# Allegro board pc043a_single_maroc_05.brd
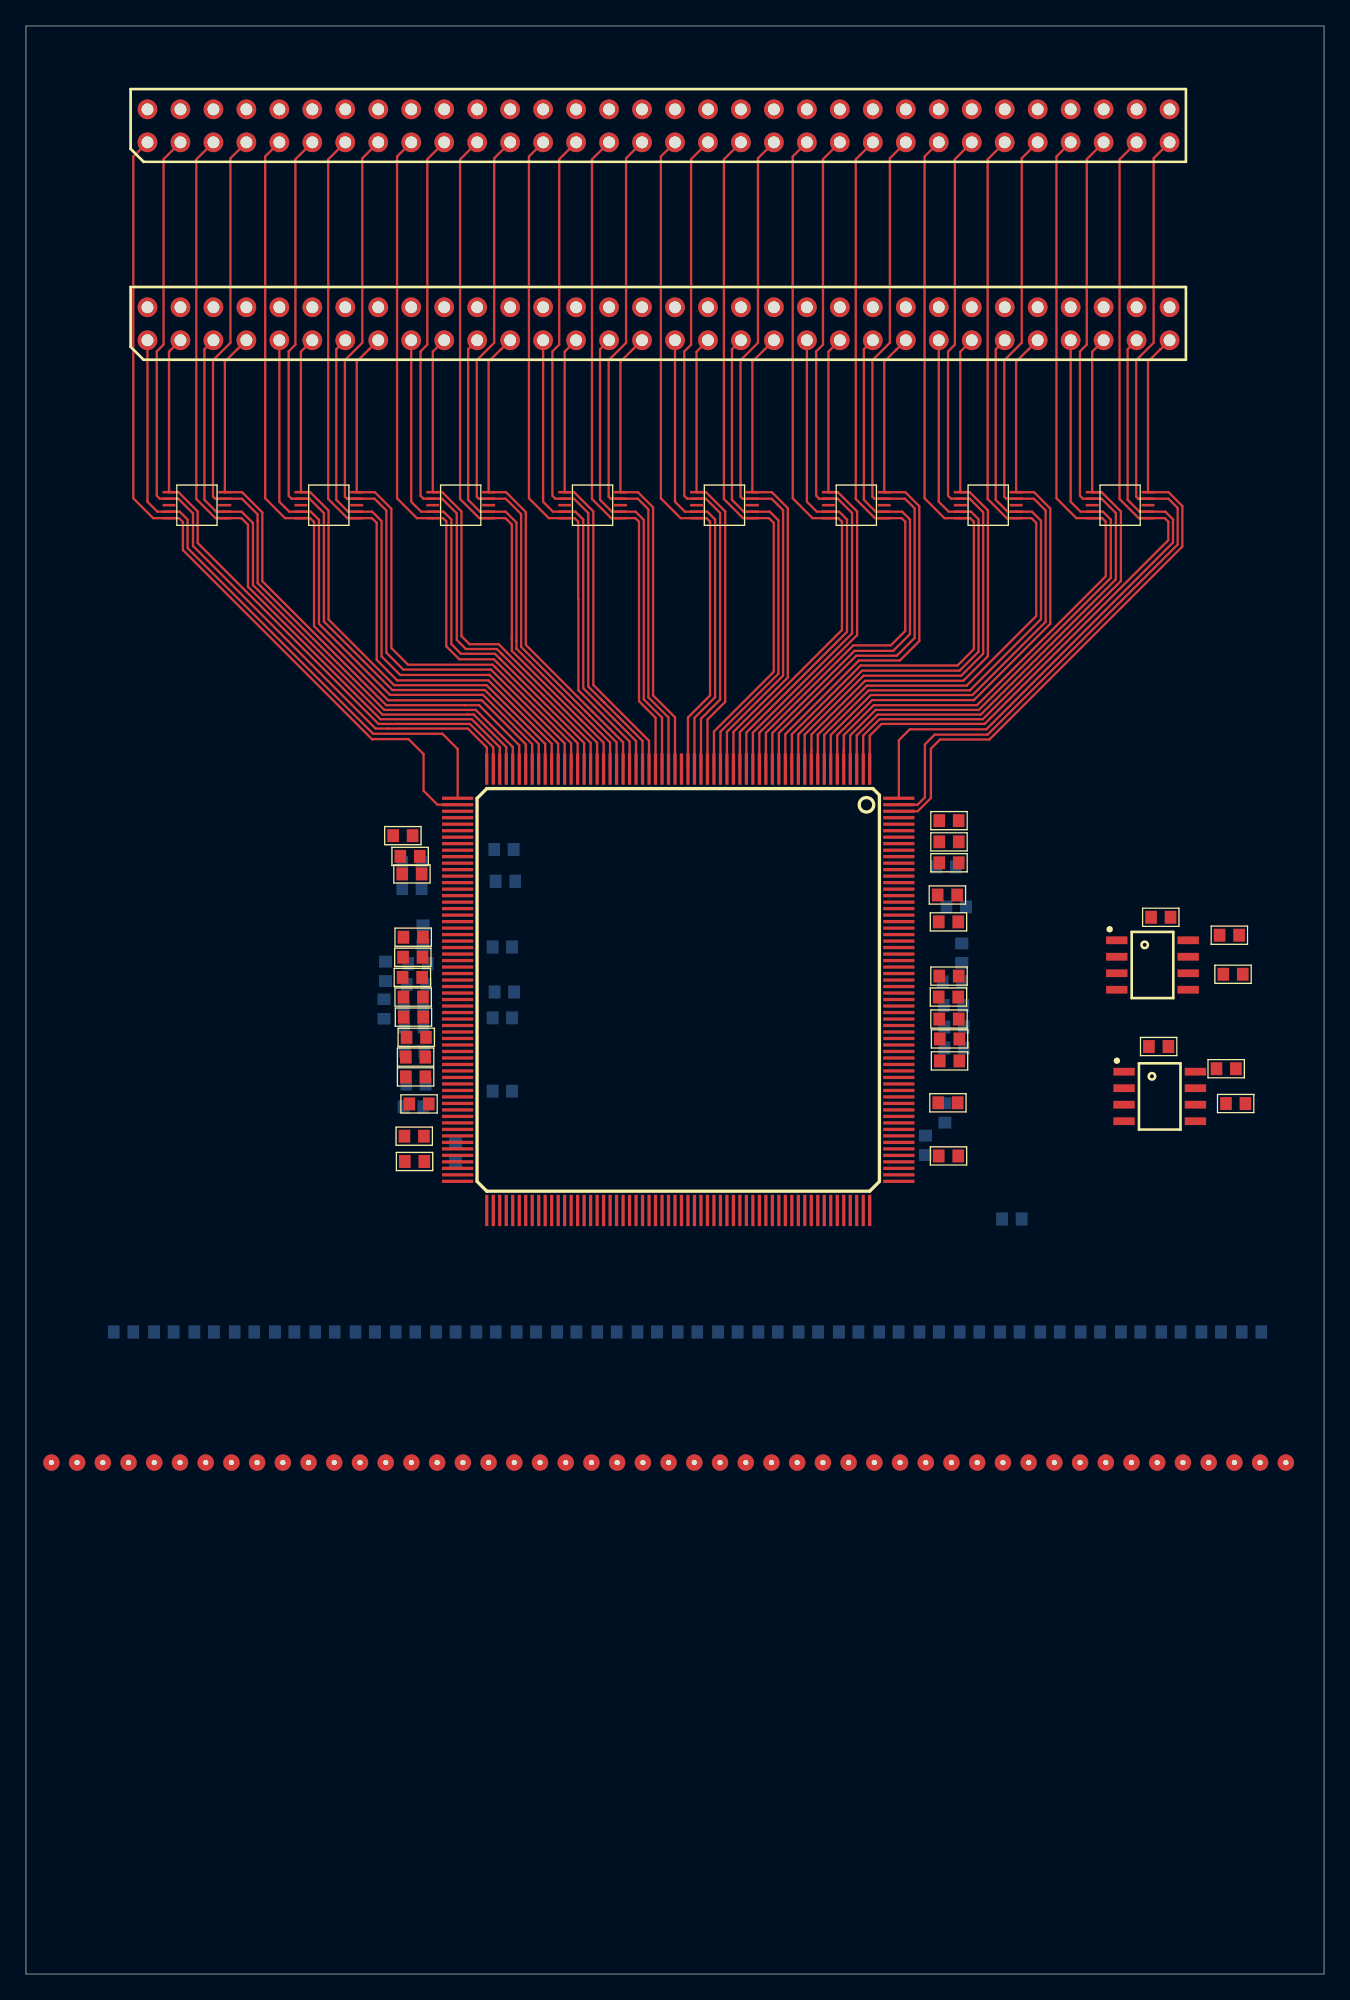
[diagram p0: board, top side]
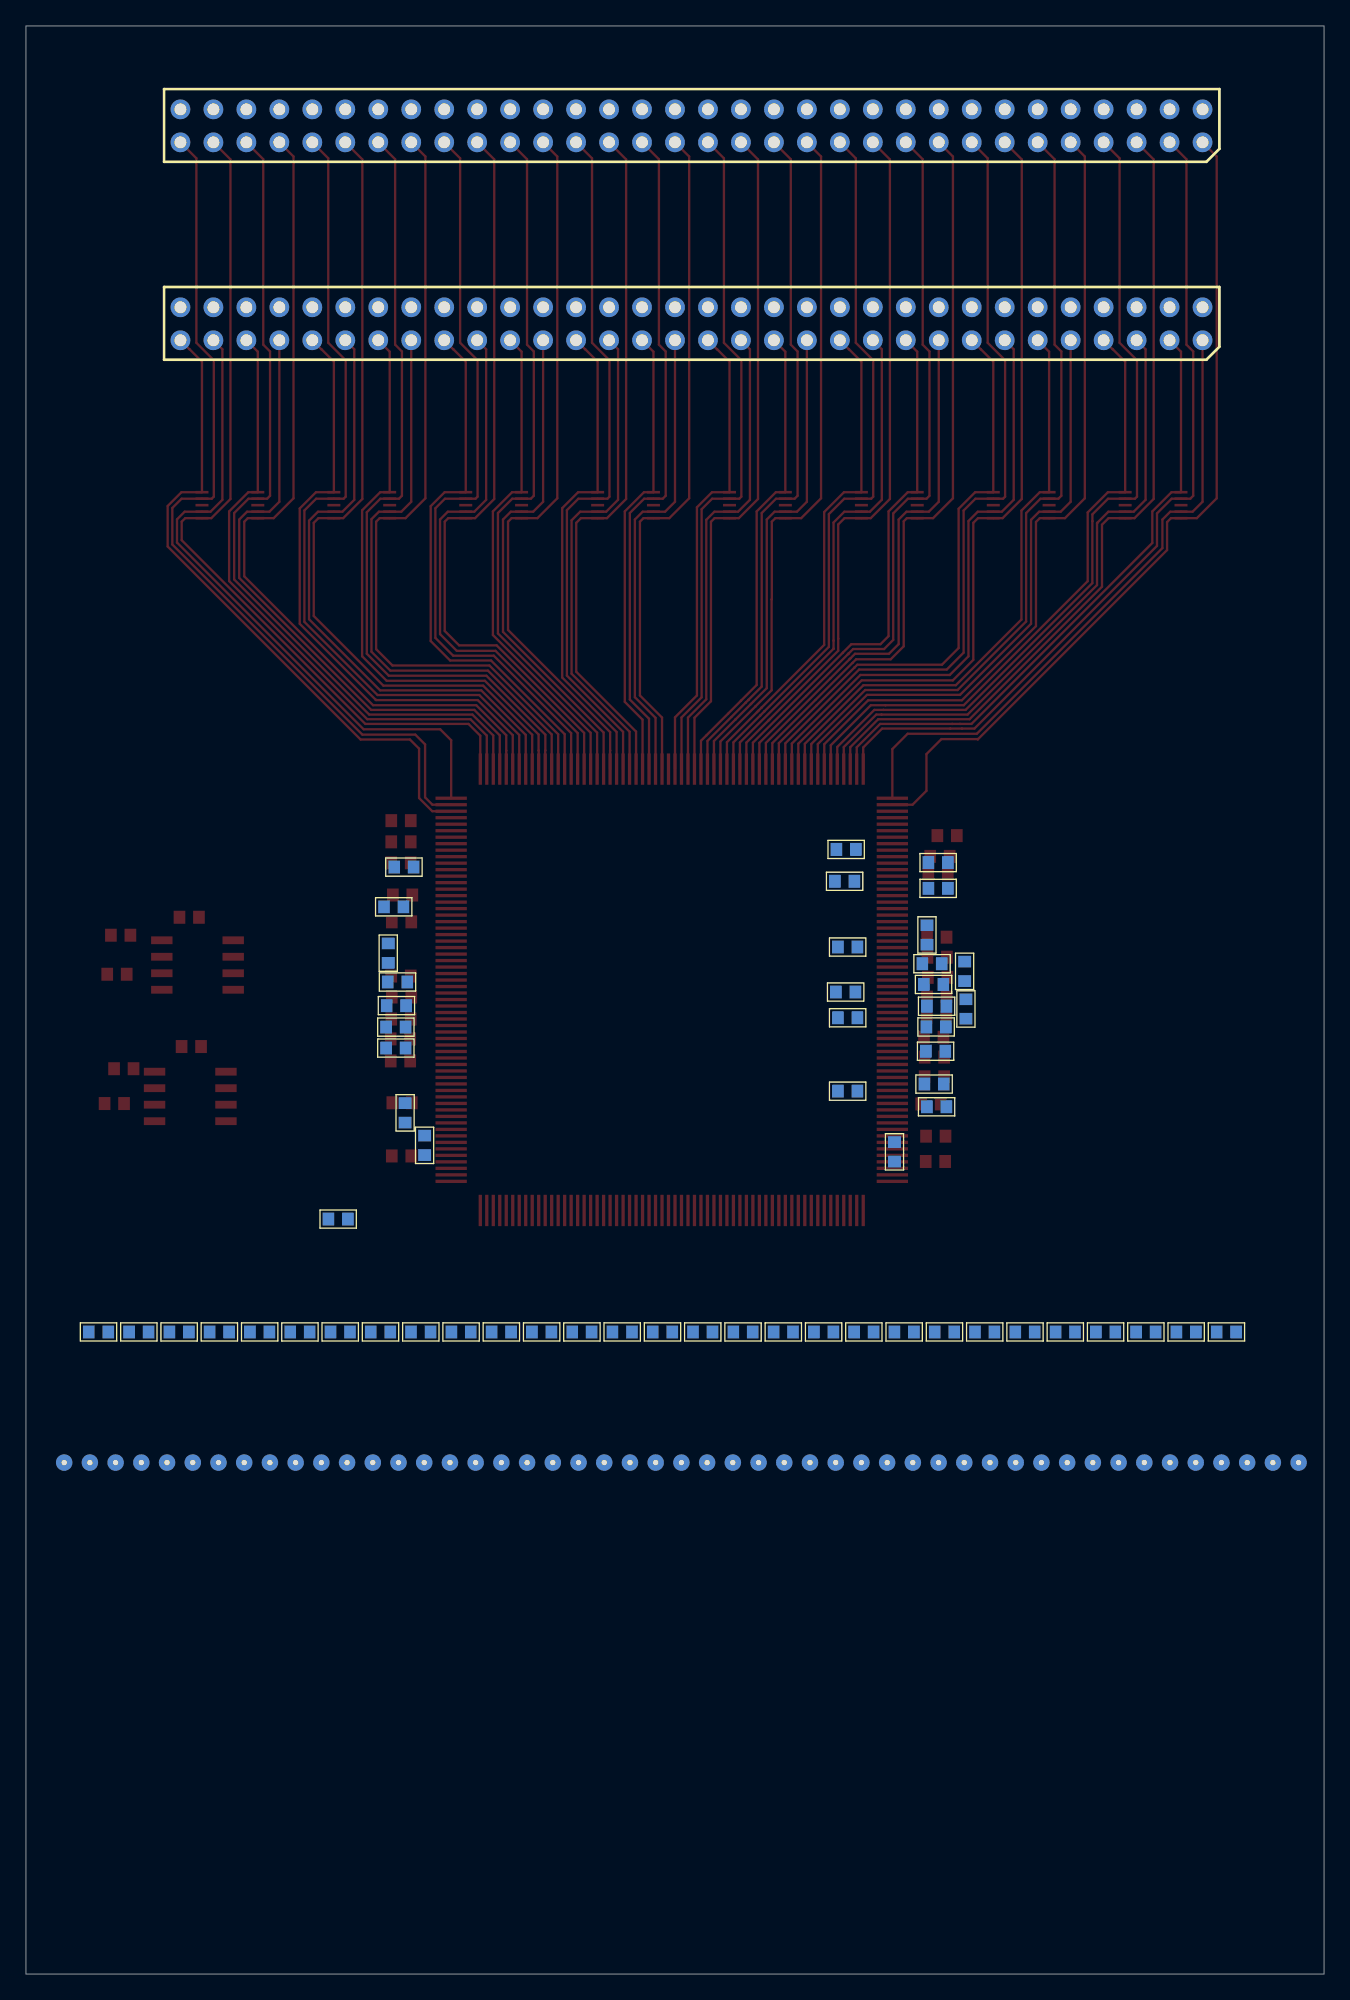
[diagram p1: board, bottom side, seen from below]

Outline 100 x 150 mm; copper layers: TOP, L2, L3, L4, L5, BOTTOM. Coordinates in mm from the lower left corner of the outline.
Outline path: 0,150 100,150 100,0 0,0 0,150

## Design rules (mm)
net group OR: nets OR<0> OR<1>
net group IN: nets IN<0> IN<1> IN<2> IN<3> IN<4> IN<5> IN<6> IN<7> IN<8> IN<9> IN<10> IN<11> IN<12> IN<13> IN<14> IN<15> IN<16> IN<17> IN<18> IN<19> IN<20> IN<21> IN<22> IN<23> IN<24> IN<25> IN<26> IN<27> IN<28> IN<29> IN<30> IN<31> IN<32> IN<33> IN<34> IN<35> IN<36> IN<37> IN<38> IN<39> IN<40> IN<41> IN<42> IN<43> IN<44> IN<45> IN<46> IN<47> IN<48> IN<49> IN<50> IN<51> IN<52> IN<53> IN<54> IN<55> IN<56> IN<57> IN<58> IN<59> IN<60> IN<61> IN<62> IN<63>
net group SUM: nets SUM<1> SUM<2> SUM<3> SUM<4> SUM<5> SUM<6> SUM<7> SUM<8>
net group TRIG: nets TRIG<0> TRIG<1> TRIG<2> TRIG<3> TRIG<4> TRIG<5> TRIG<6> TRIG<7> TRIG<8> TRIG<9> TRIG<10> TRIG<11> TRIG<12> TRIG<13> TRIG<14> TRIG<15> TRIG<16> TRIG<17> TRIG<18> TRIG<19> TRIG<20> TRIG<21> TRIG<22> TRIG<23> TRIG<24> TRIG<25> TRIG<26> TRIG<27> TRIG<28> TRIG<29> TRIG<30> TRIG<31> TRIG<32> TRIG<33> TRIG<34> TRIG<35> TRIG<36> TRIG<37> TRIG<38> TRIG<39> TRIG<40> TRIG<41> TRIG<42> TRIG<43> TRIG<44> TRIG<45> TRIG<46> TRIG<47> TRIG<48> TRIG<49> TRIG<50> TRIG<51> TRIG<52> TRIG<53> TRIG<54> TRIG<55> TRIG<56> TRIG<57> TRIG<58> TRIG<59> TRIG<60> TRIG<61> TRIG<62> TRIG<63>

## Placement (name value [footprint] x y rotation side)
C1  100nF  [C0603]  71.07 62.99 0 top
C2  100nF  [C0603]  29.91 64.51 0 top
C3  100nF  [C0603]  30.2 77.79 0 bottom
C4  100nF  [C0603]  71.11 88.81 180 top
C5  100nF  [C0603]  70.98 83.08 180 top
C6  100nF  [C0603]  71.11 87.18 180 top
C7  100nF  [C0603]  71.67 82.17 0 bottom
C8  100nF  [C0603]  29.04 87.66 0 top
C9  100nF  [C0603]  29.83 79.84 0 top
C10  100nF  [C0603]  71.07 81.02 180 top
C11  100nF  [C0603]  29.93 71.06 0 bottom
C12  100nF  [C0603]  71.38 76.39 0 bottom
C13  100nF  [C0603]  29.83 75.22 0 top
C14  100nF  [C0603]  30.04 68.53 0 bottom
C15  100nF  [C0603]  29.85 66.77 0 bottom
C16  100nF  [C0603]  71.15 72 180 top
C17  100nF  [C0603]  71.03 67.08 180 top
C18  100nF  [C0603]  36.82 86.59 180 bottom
C19  100nF  [C0603]  30.07 72.12 0 top
C20  100nF  [C0603]  29.73 83.6 0 bottom
C21  100nF  [C0603]  36.7 73.63 180 bottom
C22  100nF  [C0603]  29.77 76.74 0 top
C23  100nF  [C0603]  71.46 74.57 0 bottom
C24  100nF  [C0603]  29.8 78.29 0 top
C25  100nF  [C0603]  71.15 70.31 180 top
C26  100nF  [C0603]  29.89 72.93 0 bottom
C27  100nF  [C0603]  36.86 75.61 180 bottom
C28  100nF  [C0603]  36.93 84.14 180 bottom
C29  100nF  [C0603]  30.08 76.2 180 bottom
C30  100nF  [C0603]  36.7 67.98 180 bottom
C31  100nF  [C0603]  71.07 75.23 180 top
C32  100nF  [C0603]  29.59 86.06 0 top
C33  100nF  [C0603]  29.85 74.52 0 bottom
C34  100nF  [C0603]  30.28 67 0 top
C35  100nF  [C0603]  71.11 76.84 180 top
C36  100nF  [C0603]  29.74 84.7 0 top
C37  100nF  [C0603]  71.5 71.3 0 bottom
C38  100nF  [C0603]  71.11 85.57 180 top
C39  100nF  [C0603]  29.73 85.58 0 bottom
C40  100nF  [C0603]  36.7 79.08 180 bottom
C41  100nF  [C0603]  30.02 70.6 0 top
C42  100nF  [C0603]  71.11 73.53 180 top
C43  100nF  [C0603]  70.88 85.23 0 bottom
C44  100nF  [C0603]  29.94 62.57 0 top
C45  100nF  [C0603]  30.02 69.08 0 top
C46  100nF  [C0603]  71.5 72.91 0 bottom
C47  100nF  [C0603]  29.85 73.68 0 top
C48  100nF  [C0603]  92.46 69.71 0 top
C49  100nF  [C0603]  92.71 79.99 0 top
IC1  -  [SOIC127P598X200-8N]  87.34 67.57 0 top
IC2  -  [SOIC127P598X200-8N]  86.78 77.69 0 top
J1  -  [CONHE13D2X32M]  9.36 141.04 270 top
J2  -  [CONHE13D2X32M]  9.36 125.8 270 top
LK1  -  [1-HOLE_0-4P]  11.86 39.38 0 top
LK2  -  [1-HOLE_0-4P]  13.85 39.38 0 top
LK3  -  [1-HOLE_0-4P]  15.83 39.38 0 top
LK4  -  [1-HOLE_0-4P]  17.81 39.38 0 top
LK5  -  [1-HOLE_0-4P]  19.79 39.38 0 top
LK6  -  [1-HOLE_0-4P]  21.77 39.38 0 top
LK7  -  [1-HOLE_0-4P]  23.75 39.38 0 top
LK8  -  [1-HOLE_0-4P]  25.73 39.38 0 top
LK9  -  [1-HOLE_0-4P]  27.71 39.38 0 top
LK10  -  [1-HOLE_0-4P]  29.7 39.38 0 top
LK11  -  [1-HOLE_0-4P]  31.68 39.38 0 top
LK12  -  [1-HOLE_0-4P]  33.66 39.38 0 top
LK13  -  [1-HOLE_0-4P]  1.96 39.38 0 top
LK14  -  [1-HOLE_0-4P]  35.64 39.38 0 top
LK15  -  [1-HOLE_0-4P]  37.62 39.38 0 top
LK16  -  [1-HOLE_0-4P]  39.6 39.38 0 top
LK17  -  [1-HOLE_0-4P]  41.58 39.38 0 top
LK18  -  [1-HOLE_0-4P]  43.56 39.38 0 top
LK19  -  [1-HOLE_0-4P]  45.55 39.38 0 top
LK20  -  [1-HOLE_0-4P]  47.53 39.38 0 top
LK21  -  [1-HOLE_0-4P]  49.51 39.38 0 top
LK22  -  [1-HOLE_0-4P]  51.49 39.38 0 top
LK23  -  [1-HOLE_0-4P]  53.47 39.38 0 top
LK24  -  [1-HOLE_0-4P]  55.45 39.38 0 top
LK25  -  [1-HOLE_0-4P]  57.43 39.38 0 top
LK27  -  [1-HOLE_0-4P]  3.94 39.38 0 top
LK28  -  [1-HOLE_0-4P]  5.92 39.38 0 top
LK29  -  [1-HOLE_0-4P]  7.9 39.38 0 top
LK30  -  [1-HOLE_0-4P]  9.88 39.38 0 top
LK31  -  [1-HOLE_0-4P]  59.41 39.38 0 top
LK32  -  [1-HOLE_0-4P]  61.39 39.38 0 top
LK33  -  [1-HOLE_0-4P]  63.38 39.38 0 top
LK34  -  [1-HOLE_0-4P]  65.36 39.38 0 top
LK35  -  [1-HOLE_0-4P]  67.34 39.38 0 top
LK36  -  [1-HOLE_0-4P]  69.32 39.38 0 top
LK37  -  [1-HOLE_0-4P]  71.3 39.38 0 top
LK38  -  [1-HOLE_0-4P]  73.28 39.38 0 top
LK39  -  [1-HOLE_0-4P]  75.26 39.38 0 top
LK40  -  [1-HOLE_0-4P]  77.24 39.38 0 top
LK41  -  [1-HOLE_0-4P]  79.23 39.38 0 top
LK42  -  [1-HOLE_0-4P]  81.21 39.38 0 top
LK43  -  [1-HOLE_0-4P]  83.19 39.38 0 top
LK44  -  [1-HOLE_0-4P]  85.17 39.38 0 top
LK45  -  [1-HOLE_0-4P]  87.15 39.38 0 top
LK46  -  [1-HOLE_0-4P]  89.13 39.38 0 top
LK47  -  [1-HOLE_0-4P]  91.11 39.38 0 top
LK48  -  [1-HOLE_0-4P]  93.09 39.38 0 top
LK49  -  [1-HOLE_0-4P]  95.08 39.38 0 top
LK50  -  [1-HOLE_0-4P]  97.06 39.38 0 top
R1  10  [C0603]  75.95 58.13 180 bottom
R2  10  [C0603]  13.73 49.44 180 bottom
R3  10  [C0603]  16.83 49.44 180 bottom
R4  10  [C0603]  19.93 49.44 180 bottom
R5  10  [C0603]  23.04 49.44 180 bottom
R6  10  [C0603]  26.14 49.44 180 bottom
R7  10  [C0603]  29.24 49.44 180 bottom
R8  10  [C0603]  32.35 49.44 180 bottom
R9  10  [C0603]  7.52 49.44 180 bottom
R10  10  [C0603]  27.69 77.21 270 bottom
R11  10  [C0603]  72.09 78.61 270 bottom
R12  10  [C0603]  30.59 80.01 270 bottom
R13  10  [C0603]  27.59 74.31 270 bottom
R14  10  [C0603]  70.79 66.31 270 bottom
R15  10  [C0603]  10.62 49.44 180 bottom
R16  XX  [C0603]  78.89 49.44 180 bottom
R17  XX  [C0603]  75.79 49.44 180 bottom
R18  XX  [C0603]  72.69 49.44 180 bottom
R19  XX  [C0603]  69.58 49.44 180 bottom
R20  100  [C0603]  69.29 63.81 270 bottom
R21  XX  [C0603]  66.48 49.44 180 bottom
R22  XX  [C0603]  63.38 49.44 180 bottom
R23  1k  [C0603]  94.41 49.44 180 bottom
R24  XX  [C0603]  60.27 49.44 180 bottom
R25  XX  [C0603]  57.17 49.44 180 bottom
R26  XX  [C0603]  54.07 49.44 180 bottom
R27  XX  [C0603]  50.96 49.44 180 bottom
R28  XX  [C0603]  47.86 49.44 180 bottom
R29  XX  [C0603]  44.76 49.44 180 bottom
R30  XX  [C0603]  41.65 49.44 180 bottom
R31  XX  [C0603]  38.55 49.44 180 bottom
R32  XX  [C0603]  35.45 49.44 180 bottom
R33  XX  [C0603]  33.09 63.31 270 bottom
R34  51  [C0603]  87.26 71.42 0 top
R35  51  [C0603]  87.42 81.37 0 top
R36  51  [C0603]  93.19 67.03 0 top
R37  51  [C0603]  92.99 76.98 0 top
R38  51  [C0603]  91.31 49.44 180 bottom
R39  51  [C0603]  88.2 49.44 180 bottom
R40  51  [C0603]  85.1 49.44 180 bottom
R41  51  [C0603]  82 49.44 180 bottom
U1  -  [PQFP240_050]  65 92.78 270 top
U2  -  [SOT552-1]  84.29 113.1 0 top
U3  -  [SOT552-1]  74.13 113.1 0 top
U4  -  [SOT552-1]  63.97 113.1 0 top
U5  -  [SOT552-1]  53.81 113.1 0 top
U6  -  [SOT552-1]  43.65 113.1 0 top
U7  -  [SOT552-1]  33.49 113.1 0 top
U8  -  [SOT552-1]  23.33 113.1 0 top
U9  -  [SOT552-1]  13.17 113.1 0 top

## Library data of the parts
C1-C49 = CAPCERSMDCL2: part number: CAPCERSMDCL2_0603-100NF,16V; tolerance: 10%
IC1 IC2 = AD8061: part number: AD8061ARZ
J1 J2 = CON64P: part number: CON64P-BARD2X32
LK1-LK25 LK27-LK50 = 1-HOLE: part number: 1-HOLE_0-4-BASE
R1-R15 = RSMD0603: part number: RSMD0603_1/10W-10,1%; tolerance: 1%
R16-R19 R21 R22 R24-R33 = RSMD0603: part number: RSMD0603_1/10W-XX,1%; tolerance: 1%
R20 = RSMD0603: part number: RSMD0603_1/10W-100,1%; tolerance: 1%
R23 = RSMD0603: part number: RSMD0603_1/10W-1K,1%; tolerance: 1%
R34-R41 = RSMD0603: part number: RSMD0603_1/10W-51,1%; tolerance: 1%
U1 = MAROC3: part number: MAROC3_PQFP-IN2P3
U2-U9 = PRTR5V0U8S: part number: PRTR5V0U8S_TSSOP-NXP

## Footprints (pads in the part's own frame, mm; a bottom-side part is the same pattern mirrored in y, then rotated)
1-HOLE_0-4P
  round 1.27 hole 0.406: 1(0,0)
C0603
  rect 0.9x1 smd: 1(-0.75,0) 2(0.75,0)
CONHE13D2X32M
  round 1.524 hole 0.914: 1(0,0) 2(-2.54,0) 3(0,2.54) 4(-2.54,2.54) 5(0,5.08) 6(-2.54,5.08) 7(0,7.62) 8(-2.54,7.62) 9(0,10.16) 10(-2.54,10.16) 11(0,12.7) 12(-2.54,12.7) 13(0,15.24) 14(-2.54,15.24) 15(0,17.78) 16(-2.54,17.78) 17(0,20.32) 18(-2.54,20.32) 19(0,22.86) 20(-2.54,22.86) 21(0,25.4) 22(-2.54,25.4) 23(0,27.94) 24(-2.54,27.94) 25(0,30.48) 26(-2.54,30.48) 27(0,33.02) 28(-2.54,33.02) 29(0,35.56) 30(-2.54,35.56) 31(0,38.1) 32(-2.54,38.1) 33(0,40.64) 34(-2.54,40.64) 35(0,43.18) 36(-2.54,43.18) 37(0,45.72) 38(-2.54,45.72) 39(0,48.26) 40(-2.54,48.26) 41(0,50.8) 42(-2.54,50.8) 43(0,53.34) 44(-2.54,53.34) 45(0,55.88) 46(-2.54,55.88) 47(0,58.42) 48(-2.54,58.42) 49(0,60.96) 50(-2.54,60.96) 51(0,63.5) 52(-2.54,63.5) 53(0,66.04) 54(-2.54,66.04) 55(0,68.58) 56(-2.54,68.58) 57(0,71.12) 58(-2.54,71.12) 59(0,73.66) 60(-2.54,73.66) 61(0,76.2) 62(-2.54,76.2) 63(0,78.74) 64(-2.54,78.74)
PQFP240_050
  rect 2.413x0.254 smd: 1(0,0) 2(0,-0.5) 3(0,-1) 4(0,-1.5) 5(0,-2) 6(0,-2.5) 7(0,-3) 8(0,-3.5) 9(0,-4) 10(0,-4.5) 11(0,-5) 12(0,-5.5) 13(0,-6) 14(0,-6.5) 15(0,-7) 16(0,-7.5) 17(0,-8) 18(0,-8.5) 19(0,-9) 20(0,-9.5) 21(0,-10) 22(0,-10.5) 23(0,-11) 24(0,-11.5) 25(0,-12) 26(0,-12.5) 27(0,-13) 28(0,-13.5) 29(0,-14) 30(0,-14.5) 31(0,-15) 32(0,-15.5) 33(0,-16) 34(0,-16.5) 35(0,-17) 36(0,-17.5) 37(0,-18) 38(0,-18.5) 39(0,-19) 40(0,-19.5) 41(0,-20) 42(0,-20.5) 43(0,-21) 44(0,-21.5) 45(0,-22) 46(0,-22.5) 47(0,-23) 48(0,-23.5) 49(0,-24) 50(0,-24.5) 51(0,-25) 52(0,-25.5) 53(0,-26) 54(0,-26.5) 55(0,-27) 56(0,-27.5) 57(0,-28) 58(0,-28.5) 59(0,-29) 60(0,-29.5) 121(33.987,-29.5) 122(33.987,-29) 123(33.987,-28.5) 124(33.987,-28) 125(33.987,-27.5) 126(33.987,-27) 127(33.987,-26.5) 128(33.987,-26) 129(33.987,-25.5) 130(33.987,-25) 131(33.987,-24.5) 132(33.987,-24) 133(33.987,-23.5) 134(33.987,-23) 135(33.987,-22.5) 136(33.987,-22) 137(33.987,-21.5) 138(33.987,-21) 139(33.987,-20.5) 140(33.987,-20) 141(33.987,-19.5) 142(33.987,-19) 143(33.987,-18.5) 144(33.987,-18) 145(33.987,-17.5) 146(33.987,-17) 147(33.987,-16.5) 148(33.987,-16) 149(33.987,-15.5) 150(33.987,-15) 151(33.987,-14.5) 152(33.987,-14) 153(33.987,-13.5) 154(33.987,-13) 155(33.987,-12.5) 156(33.987,-12) 157(33.987,-11.5) 158(33.987,-11) 159(33.987,-10.5) 160(33.987,-10) 161(33.987,-9.5) 162(33.987,-9) 163(33.987,-8.5) 164(33.987,-8) 165(33.987,-7.5) 166(33.987,-7) 167(33.987,-6.5) 168(33.987,-6) 169(33.987,-5.5) 170(33.987,-5) 171(33.987,-4.5) 172(33.987,-4) 173(33.987,-3.5) 174(33.987,-3) 175(33.987,-2.5) 176(33.987,-2) 177(33.987,-1.5) 178(33.987,-1) 179(33.987,-0.5) 180(33.987,0)
  rect 0.254x2.413 smd: 61(2.244,-31.744) 62(2.744,-31.744) 63(3.244,-31.744) 64(3.744,-31.744) 65(4.244,-31.744) 66(4.744,-31.744) 67(5.244,-31.744) 68(5.744,-31.744) 69(6.244,-31.744) 70(6.744,-31.744) 71(7.244,-31.744) 72(7.744,-31.744) 73(8.243,-31.744) 74(8.743,-31.744) 75(9.243,-31.744) 76(9.743,-31.744) 77(10.243,-31.744) 78(10.743,-31.744) 79(11.243,-31.744) 80(11.743,-31.744) 81(12.243,-31.744) 82(12.743,-31.744) 83(13.243,-31.744) 84(13.743,-31.744) 85(14.243,-31.744) 86(14.743,-31.744) 87(15.243,-31.744) 88(15.743,-31.744) 89(16.244,-31.744) 90(16.744,-31.744) 91(17.244,-31.744) 92(17.744,-31.744) 93(18.244,-31.744) 94(18.744,-31.744) 95(19.244,-31.744) 96(19.744,-31.744) 97(20.244,-31.744) 98(20.744,-31.744) 99(21.244,-31.744) 100(21.744,-31.744) 101(22.244,-31.744) 102(22.744,-31.744) 103(23.244,-31.744) 104(23.744,-31.744) 105(24.244,-31.744) 106(24.744,-31.744) 107(25.244,-31.744) 108(25.744,-31.744) 109(26.244,-31.744) 110(26.744,-31.744) 111(27.244,-31.744) 112(27.744,-31.744) 113(28.244,-31.744) 114(28.744,-31.744) 115(29.244,-31.744) 116(29.744,-31.744) 117(30.244,-31.744) 118(30.744,-31.744) 119(31.244,-31.744) 120(31.744,-31.744) 181(31.744,2.244) 182(31.244,2.244) 183(30.744,2.244) 184(30.244,2.244) 185(29.744,2.244) 186(29.244,2.244) 187(28.744,2.244) 188(28.244,2.244) 189(27.744,2.244) 190(27.244,2.244) 191(26.744,2.244) 192(26.244,2.244) 193(25.744,2.244) 194(25.244,2.244) 195(24.744,2.244) 196(24.244,2.244) 197(23.744,2.244) 198(23.244,2.244) 199(22.744,2.244) 200(22.244,2.244) 201(21.744,2.244) 202(21.244,2.244) 203(20.744,2.244) 204(20.244,2.244) 205(19.744,2.244) 206(19.244,2.244) 207(18.744,2.244) 208(18.244,2.244) 209(17.744,2.244) 210(17.244,2.244) 211(16.744,2.244) 212(16.244,2.244) 213(15.743,2.244) 214(15.243,2.244) 215(14.743,2.244) 216(14.243,2.244) 217(13.743,2.244) 218(13.243,2.244) 219(12.743,2.244) 220(12.243,2.244) 221(11.743,2.244) 222(11.243,2.244) 223(10.743,2.244) 224(10.243,2.244) 225(9.743,2.244) 226(9.243,2.244) 227(8.743,2.244) 228(8.243,2.244) 229(7.744,2.244) 230(7.244,2.244) 231(6.744,2.244) 232(6.244,2.244) 233(5.744,2.244) 234(5.244,2.244) 235(4.744,2.244) 236(4.244,2.244) 237(3.744,2.244) 238(3.244,2.244) 239(2.744,2.244) 240(2.244,2.244)
SOIC127P598X200-8N
  rect 1.65x0.6 smd: 1(-2.75,1.905) 2(-2.75,0.635) 3(-2.75,-0.635) 4(-2.75,-1.905) 5(2.75,-1.905) 6(2.75,-0.635) 7(2.75,0.635) 8(2.75,1.905)
SOT552-1
  rect 1x0.2 smd: 1(-2.15,1) 2(-2.15,0.5) 3(-2.15,0) 4(-2.15,-0.5) 5(-2.15,-1) 6(2.15,-1) 7(2.15,-0.5) 8(2.15,0) 9(2.15,0.5) 10(2.15,1)

## Nets
AVDD: C29.2(B<0>) C48.1(A<0>) C49.1(A<0>) IC1.7(PVS) IC2.7(PVS) R3.2(B<0>) R4.2(B<0>) R5.2(B<0>) R6.2(B<0>) R7.2(B<0>) R8.2(B<0>) R9.2(B<0>) R10.2(B<0>) R11.2(B<0>) R12.2(B<0>) R13.2(B<0>) R14.2(B<0>) R15.2(B<0>) R16.2(B<0>) R18.2(B<0>) R21.2(B<0>) R23.2(B<0>) R24.2(B<0>) R26.2(B<0>) R28.2(B<0>) R30.2(B<0>) R32.2(B<0>) U2.8 U3.8 U4.8 U5.8 U6.8 U7.8 U8.8 U9.8
DVDD: R1.1(A<0>) R2.2(B<0>)
GND: U2.3 U3.3 U4.3 U5.3 U6.3 U7.3 U8.3 U9.3
GND_SIGNAL: C1.2(B<0>) C2.1(A<0>) C3.1(A<0>) C4.1(A<0>) C5.1(A<0>) C6.1(A<0>) C7.1(A<0>) C8.1(A<0>) C9.1(A<0>) C10.1(A<0>) C11.1(A<0>) C12.1(A<0>) C13.1(A<0>) C14.1(A<0>) C15.1(A<0>) C16.1(A<0>) C17.1(A<0>) C18.1(A<0>) C19.1(A<0>) C20.1(A<0>) C21.1(A<0>) C22.1(A<0>) C23.1(A<0>) C24.1(A<0>) C25.1(A<0>) C26.1(A<0>) C27.1(A<0>) C28.1(A<0>) C30.1(A<0>) C31.1(A<0>) C32.1(A<0>) C33.1(A<0>) C34.1(A<0>) C35.1(A<0>) C36.1(A<0>) C37.1(A<0>) C38.1(A<0>) C39.1(A<0>) C40.1(A<0>) C41.1(A<0>) C42.1(A<0>) C43.1(A<0>) C44.1(A<0>) C45.1(A<0>) C46.1(A<0>) C47.1(A<0>) C48.2(B<0>) C49.2(B<0>) IC1.4(MVS) IC2.4(MVS) J1.2(A<1>) J1.4(A<3>) J1.6(A<5>) J1.8(A<7>) J1.10(A<9>) J1.12(A<11>) J1.14(A<13>) J1.16(A<15>) J1.18(A<17>) J1.20(A<19>) J1.22(A<21>) J1.24(A<23>) J1.26(A<25>) J1.28(A<27>) J1.30(A<29>) J1.32(A<31>) J1.34(A<33>) J1.36(A<35>) J1.38(A<37>) J1.40(A<39>) J1.42(A<41>) J1.44(A<43>) J1.46(A<45>) J1.48(A<47>) J1.50(A<49>) J1.52(A<51>) J1.54(A<53>) J1.56(A<55>) J1.58(A<57>) J1.60(A<59>) J1.62(A<61>) J1.64(A<63>) J2.2(A<1>) J2.4(A<3>) J2.6(A<5>) J2.8(A<7>) J2.10(A<9>) J2.12(A<11>) J2.14(A<13>) J2.16(A<15>) J2.18(A<17>) J2.20(A<19>) J2.22(A<21>) J2.24(A<23>) J2.26(A<25>) J2.28(A<27>) J2.30(A<29>) J2.32(A<31>) J2.34(A<33>) J2.36(A<35>) J2.38(A<37>) J2.40(A<39>) J2.42(A<41>) J2.44(A<43>) J2.46(A<45>) J2.48(A<47>) J2.50(A<49>) J2.52(A<51>) J2.54(A<53>) J2.56(A<55>) J2.58(A<57>) J2.60(A<59>) J2.62(A<61>) J2.64(A<63>) LK30.1(A<0>) R17.1(A<0>) R19.1(A<0>) R22.1(A<0>) R25.1(A<0>) R27.1(A<0>) R29.1(A<0>) R31.1(A<0>) R33.1(A<0>) U1.30(GND_PA2) U1.63(GND_PA) U1.65(VSSA) U1.73(GND_NMOS) U1.77(GND_W) U1.85(GND_DAC) U1.92(E_FSU) U1.98(GND_WILK) U1.102(VSSA2) U1.103(VSSM) U1.109(GND_DISCRI) U1.111(VSSD) U1.112(GNDD) U1.150(VSSD2) U1.183(GNDD2) U1.189(VSSD3) U1.195(GND_DISCRI2) U1.197(VSSM2) U1.198(VSS) U1.202(GND_FSU) U1.206(GND_FSB1) U1.211(GND_FSB0) U1.217(GND_CAPA) U1.219(GND_SS) U1.227(GND_OTAG) U1.231(GND_NMOS2) U1.235(VSSI) U1.237(GND_PA3)
VDD_BUF1: C7.2(B<0>) LK7.1(A<0>) R7.1(A<0>) U1.223(VDD_BUF1)
VDD_DAC: C3.2(B<0>) LK3.1(A<0>) R3.1(A<0>) U1.87(VDD_DAC)
VDD_DISCRI: C14.2(B<0>) LK14.1(A<0>) R13.1(A<0>) U1.105(VDD_DISCRI)
VDD_DISCRIADC: C15.2(B<0>) C17.2(B<0>) LK15.1(A<0>) R14.1(A<0>) U1.107(VDD_DISCRIADC) U1.193(VDD_DISCRIADC2)
VDD_FSB: C12.2(B<0>) LK10.1(A<0>) R11.1(A<0>) U1.210(VDD_FSB)
VDD_FSU1: C13.2(B<0>) LK11.1(A<0>) R12.1(A<0>) U1.90(VDD_FSU1)
VDD_FSU2: C16.2(B<0>) LK13.1(A<0>) R15.1(A<0>) U1.204(VDD_FSU2)
VDD_OTAG: C5.2(B<0>) LK5.1(A<0>) R5.1(A<0>) U1.225(VDD_OTAG)
VDD_PA: C6.2(B<0>) C8.2(B<0>) LK6.1(A<0>) R6.1(A<0>) U1.67(VDD_PA) U1.233(VDD_PA2)
VDD_PAD: C4.2(B<0>) LK4.1(A<0>) R4.1(A<0>) U1.236(VDD_PAD)
VDD_SS: C10.2(B<0>) LK9.1(A<0>) R9.1(A<0>) U1.221(VDD_SS)
VDD_W: C9.2(B<0>) LK8.1(A<0>) R8.1(A<0>) U1.83(VDD_W)
VDD_WILK: C11.2(B<0>) LK12.1(A<0>) R10.1(A<0>) U1.100(VDD_WILK)
VDDD: C1.1(A<0>) LK1.1(A<0>) R1.2(B<0>) U1.185(VDDD)
VDDD2: C2.2(B<0>) LK2.1(A<0>) R2.1(A<0>) U1.113(VDDD2)
ADC_DAV: R40.1(A<0>)
BUF_OUT_FS: R36.2(B<0>)
BUF_OUT_Q: R37.2(B<0>)
CK_40M: R20.1(A<0>) U1.188(CK_40M)
CK_R: U1.78(CK_R)
CK_SC: U1.68(CK_SC)
CKB_40M: R20.2(B<0>) U1.186(CKB_40M)
CTEST: U1.234(CTEST)
D_R: U1.82(D_R)
D_SC: U1.64(D_SC)
EN_OTAG: U1.213(EN_OTAG)
G_DIODE: C27.2(B<0>) LK25.1(A<0>) U1.91(G_DIODE)
HOLD1: U1.79(HOLD1)
HOLD2: U1.81(HOLD2)
IB_INTEG: C41.2(B<0>) LK44.1(A<0>) U1.101(IB_INTEG)
IB_SUM: C35.2(B<0>) LK38.1(A<0>) U1.212(IB_SUM)
IB_W: C31.2(B<0>) LK34.1(A<0>) U1.209(IB_W)
IBI_BUF: C28.2(B<0>) LK31.1(A<0>) U1.74(IBI_BUF)
IBI_SS: C32.2(B<0>) LK35.1(A<0>) U1.70(IBI_SS)
IBO_DAC: C40.2(B<0>) LK43.1(A<0>) U1.84(IBO_DAC)
IBO_SS: C36.2(B<0>) LK39.1(A<0>) U1.72(IBO_SS)
IN<0>: J2.63(A<62>) U1.238(IN0) U2.10(IN)
IN<1>: J1.63(A<62>) U1.239(IN1) U2.9(IN)
IN<2>: J2.61(A<60>) U1.240(IN2) U2.7(IN)
IN<3>: J1.61(A<60>) U1.1(IN3) U2.6(IN)
IN<4>: J2.59(A<58>) U1.2(IN4) U2.1(IN)
IN<5>: J1.59(A<58>) U1.3(IN5) U2.2(IN)
IN<6>: J2.57(A<56>) U1.4(IN6) U2.4(IN)
IN<7>: J1.57(A<56>) U1.5(IN7) U2.5(IN)
IN<8>: J2.55(A<54>) U1.6(IN8) U3.10(IN)
IN<9>: J1.55(A<54>) U1.7(IN9) U3.9(IN)
IN<10>: J2.53(A<52>) U1.8(IN10) U3.7(IN)
IN<11>: J1.53(A<52>) U1.9(IN11) U3.6(IN)
IN<12>: J2.51(A<50>) U1.10(IN12) U3.1(IN)
IN<13>: J1.51(A<50>) U1.11(IN13) U3.2(IN)
IN<14>: J2.49(A<48>) U1.12(IN14) U3.4(IN)
IN<15>: J1.49(A<48>) U1.13(IN15) U3.5(IN)
IN<16>: J2.47(A<46>) U1.14(IN16) U4.10(IN)
IN<17>: J1.47(A<46>) U1.15(IN17) U4.9(IN)
IN<18>: J2.45(A<44>) U1.16(IN18) U4.7(IN)
IN<19>: J1.45(A<44>) U1.17(IN19) U4.6(IN)
IN<20>: J2.43(A<42>) U1.18(IN20) U4.1(IN)
IN<21>: J1.43(A<42>) U1.19(IN21) U4.2(IN)
IN<22>: J2.41(A<40>) U1.20(IN22) U4.4(IN)
IN<23>: J1.41(A<40>) U1.21(IN23) U4.5(IN)
IN<24>: J2.39(A<38>) U1.22(IN24) U5.10(IN)
IN<25>: J1.39(A<38>) U1.23(IN25) U5.9(IN)
IN<26>: J2.37(A<36>) U1.24(IN26) U5.7(IN)
IN<27>: J1.37(A<36>) U1.25(IN27) U5.6(IN)
IN<28>: J2.35(A<34>) U1.26(IN28) U5.1(IN)
IN<29>: J1.35(A<34>) U1.27(IN29) U5.2(IN)
IN<30>: J2.33(A<32>) U1.28(IN30) U5.4(IN)
IN<31>: J1.33(A<32>) U1.29(IN31) U5.5(IN)
IN<32>: J2.31(A<30>) U1.31(IN32) U6.10(IN)
IN<33>: J1.31(A<30>) U1.32(IN33) U6.9(IN)
IN<34>: J2.29(A<28>) U1.33(IN34) U6.7(IN)
IN<35>: J1.29(A<28>) U1.34(IN35) U6.6(IN)
IN<36>: J2.27(A<26>) U1.35(IN36) U6.1(IN)
IN<37>: J1.27(A<26>) U1.36(IN37) U6.2(IN)
IN<38>: J2.25(A<24>) U1.37(IN38) U6.4(IN)
IN<39>: J1.25(A<24>) U1.38(IN39) U6.5(IN)
IN<40>: J2.23(A<22>) U1.39(IN40) U7.10(IN)
IN<41>: J1.23(A<22>) U1.40(IN41) U7.9(IN)
IN<42>: J2.21(A<20>) U1.41(IN42) U7.7(IN)
IN<43>: J1.21(A<20>) U1.42(IN43) U7.6(IN)
IN<44>: J2.19(A<18>) U1.43(IN44) U7.1(IN)
IN<45>: J1.19(A<18>) U1.44(IN45) U7.2(IN)
IN<46>: J2.17(A<16>) U1.45(IN46) U7.4(IN)
IN<47>: J1.17(A<16>) U1.46(IN47) U7.5(IN)
IN<48>: J2.15(A<14>) U1.47(IN48) U8.10(IN)
IN<49>: J1.15(A<14>) U1.48(IN49) U8.9(IN)
IN<50>: J2.13(A<12>) U1.49(IN50) U8.7(IN)
IN<51>: J1.13(A<12>) U1.50(IN51) U8.6(IN)
IN<52>: J2.11(A<10>) U1.51(IN52) U8.1(IN)
IN<53>: J1.11(A<10>) U1.52(IN53) U8.2(IN)
IN<54>: J2.9(A<8>) U1.53(IN54) U8.4(IN)
IN<55>: J1.9(A<8>) U1.54(IN55) U8.5(IN)
IN<56>: J2.7(A<6>) U1.55(IN56) U9.10(IN)
IN<57>: J1.7(A<6>) U1.56(IN57) U9.9(IN)
IN<58>: J2.5(A<4>) U1.57(IN58) U9.7(IN)
IN<59>: J1.5(A<4>) U1.58(IN59) U9.6(IN)
IN<60>: J2.3(A<2>) U1.59(IN60) U9.1(IN)
IN<61>: J1.3(A<2>) U1.60(IN61) U9.2(IN)
IN<62>: J2.1(A<0>) U1.61(IN62) U9.4(IN)
IN<63>: J1.1(A<0>) U1.62(IN63) U9.5(IN)
IREF_DAC: C24.2(B<0>) LK22.1(A<0>) R21.1(A<0>) R22.2(B<0>) U1.86(IREF_DAC)
OR<0>: R38.2(B<0>)
OR<1>: R39.2(B<0>)
OUT_ADC: R41.1(A<0>)
OUT_FS: IC1.3(PIN) U1.201(OUT_FS)
OUT_Q: IC2.3(PIN) U1.215(OUT_Q)
PWR_ON: R23.1(A<0>) U1.110(PWR_ON)
QBUF_R: U1.76(QBUF_R)
QBUF_SC: U1.199(QBUF_SC)
RAMP: LK27.1(A<0>) U1.97(RAMP)
RSTB_R: U1.80(RSTB_R)
RSTN_ADC: U1.184(RSTN_ADC)
RSTN_SC: U1.66(RSTN_SC)
START_ADCB: U1.116(START_ADCB)
SUM<1>: U1.228(SUM1)
SUM<2>: U1.226(SUM2)
SUM<3>: U1.224(SUM3)
SUM<4>: U1.222(SUM4)
SUM<5>: U1.220(SUM5)
SUM<6>: U1.218(SUM6)
SUM<7>: U1.216(SUM7)
SUM<8>: U1.214(SUM8)
TRIG<0>: U1.182(OUT0)
TRIG<1>: U1.181(OUT1)
TRIG<2>: U1.180(OUT2)
TRIG<3>: U1.179(OUT3)
TRIG<4>: U1.178(OUT4)
TRIG<5>: U1.177(OUT5)
TRIG<6>: U1.176(OUT6)
TRIG<7>: U1.175(OUT7)
TRIG<8>: U1.174(OUT8)
TRIG<9>: U1.173(OUT9)
TRIG<10>: U1.172(OUT10)
TRIG<11>: U1.171(OUT11)
TRIG<12>: U1.170(OUT12)
TRIG<13>: U1.169(OUT13)
TRIG<14>: U1.168(OUT14)
TRIG<15>: U1.167(OUT15)
TRIG<16>: U1.166(OUT16)
TRIG<17>: U1.165(OUT17)
TRIG<18>: U1.164(OUT18)
TRIG<19>: U1.163(OUT19)
TRIG<20>: U1.162(OUT20)
TRIG<21>: U1.161(OUT21)
TRIG<22>: U1.160(OUT22)
TRIG<23>: U1.159(OUT23)
TRIG<24>: U1.158(OUT24)
TRIG<25>: U1.157(OUT25)
TRIG<26>: U1.156(OUT26)
TRIG<27>: U1.155(OUT27)
TRIG<28>: U1.154(OUT28)
TRIG<29>: U1.153(OUT29)
TRIG<30>: U1.152(OUT30)
TRIG<31>: U1.151(OUT31)
TRIG<32>: U1.149(OUT32)
TRIG<33>: U1.148(OUT33)
TRIG<34>: U1.147(OUT34)
TRIG<35>: U1.146(OUT35)
TRIG<36>: U1.145(OUT36)
TRIG<37>: U1.144(OUT37)
TRIG<38>: U1.143(OUT38)
TRIG<39>: U1.142(OUT39)
TRIG<40>: U1.141(OUT40)
TRIG<41>: U1.140(OUT41)
TRIG<42>: U1.139(OUT42)
TRIG<43>: U1.138(OUT43)
TRIG<44>: U1.137(OUT44)
TRIG<45>: U1.136(OUT45)
TRIG<46>: U1.135(OUT46)
TRIG<47>: U1.134(OUT47)
TRIG<48>: U1.133(OUT48)
TRIG<49>: U1.132(OUT49)
TRIG<50>: U1.131(OUT50)
TRIG<51>: U1.130(OUT51)
TRIG<52>: U1.129(OUT52)
TRIG<53>: U1.128(OUT53)
TRIG<54>: U1.127(OUT54)
TRIG<55>: U1.126(OUT55)
TRIG<56>: U1.125(OUT56)
TRIG<57>: U1.124(OUT57)
TRIG<58>: U1.123(OUT58)
TRIG<59>: U1.122(OUT59)
TRIG<60>: U1.121(OUT60)
TRIG<61>: U1.120(OUT61)
TRIG<62>: U1.119(OUT62)
TRIG<63>: U1.118(OUT63)
UNNAMED_1_MAROC3_I1_OR0: R38.1(A<0>) U1.191(OR_0)
UNNAMED_1_MAROC3_I1_OR1: R39.1(A<0>) U1.192(OR_1)
UNNAMED_3_MAROC3_I1_ADCDAV: R40.2(B<0>) U1.114(ADC_DAV)
UNNAMED_3_MAROC3_I1_OUTADC: R41.2(B<0>) U1.115(OUT_ADC)
UNNAMED_8_AD8061_I1_MIN: IC1.2(MIN) R34.1(A<0>)
UNNAMED_8_AD8061_I1_VOUT: IC1.6(VOUT) R34.2(B<0>) R36.1(A<0>)
UNNAMED_8_AD8061_I11_MIN: IC2.2(MIN) R35.1(A<0>)
UNNAMED_8_AD8061_I11_VOUT: IC2.6(VOUT) R35.2(B<0>) R37.1(A<0>)
V_BG: C25.2(B<0>) LK23.1(A<0>) U1.200(V_BG)
VB_OTAFSU: C37.2(B<0>) LK40.1(A<0>) U1.203(VB_OTAFSU)
VBI_DISCRI: C45.2(B<0>) LK48.1(A<0>) U1.104(VBI_DISCRI)
VBI_DISCRIADC: C44.2(B<0>) LK47.1(A<0>) R32.1(A<0>) R33.2(B<0>) U1.117(VBI_DISCRIADC)
VBI_FSB: C42.2(B<0>) LK45.1(A<0>) U1.207(VBI_FSB)
VBI_PA: C38.2(B<0>) LK41.1(A<0>) R30.1(A<0>) R31.2(B<0>) U1.230(VBI_PA)
VBI_TZ: C29.1(A<0>) LK32.1(A<0>) R24.1(A<0>) R25.2(B<0>) U1.89(VBI_TZ)
VBM_DISCRI: C30.2(B<0>) LK33.1(A<0>) U1.106(VBM_DISCRI)
VBO_DISCRI: C34.2(B<0>) LK37.1(A<0>) R28.1(A<0>) R29.2(B<0>) U1.108(VBO_DISCRI)
VBO_FSB: C46.2(B<0>) LK49.1(A<0>) U1.205(VBO_FSB)
VBO_TZ: C33.2(B<0>) LK36.1(A<0>) R26.1(A<0>) R27.2(B<0>) U1.93(VBO_TZ)
VCASC_FSU: C47.2(B<0>) LK50.1(A<0>) U1.94(VCASC_FSU)
VCASC_NMOS: C43.2(B<0>) LK46.1(A<0>) U1.229(VCASC_NMOS)
VCASC_PMOS: C39.2(B<0>) LK42.1(A<0>) U1.71(VCASC_PMOS)
VGAIN_PA: C18.2(B<0>) LK16.1(A<0>) U1.69(VGAIN_PA)
VH: U1.190(VH)
VL: U1.187(VL)
VREF_DAC: C22.2(B<0>) LK20.1(A<0>) U1.88(VREF_DAC)
VREF_FSB: C23.2(B<0>) LK21.1(A<0>) U1.208(VREF_FSB)
VREF_FSU: C26.2(B<0>) LK24.1(A<0>) U1.96(VREF_FSU)
VREF_RAMP: C19.2(B<0>) LK17.1(A<0>) R16.1(A<0>) R17.2(B<0>) U1.99(VREF_RAMP)
VREF_SS: C20.2(B<0>) LK18.1(A<0>) U1.75(VREF_SS)
VSLOPE: C21.2(B<0>) LK19.1(A<0>) R18.1(A<0>) R19.2(B<0>) U1.95(VSLOPE)
VTH0: LK28.1(A<0>) U1.196(VTH0)
VTH1: LK29.1(A<0>) U1.194(VTH1)

Pads without a net: IC1 1 5 8; IC2 1 5 8; U1 232

## Routing (per net, layer and track width the routed paths; a pad name or vN(x,y) marks a point on that pad's centre or on a via; arc(x,y) is an arc through that point)
IN<0>: length 51.1
  TOP w0.18: U1.238 68.7,89.54 69.71,90.55 69.71,94.35 70.42,95.06 74.22,95.06 89.08,109.92 89.08,113.03 88.02,114.1 U2.10 86.44,124.15 87.39,125.11 87.41,125.11 J2.63
IN<1>: length 66.9
  TOP w0.18: J1.63 86.87,139.81 86.87,125.61 85.53,124.26 85.53,113.76 85.69,113.6 U2.9 88.01,113.6 88.72,112.89 88.72,110.07 74.08,95.43 70.01,95.43 69.25,94.68 69.25,90.6 68.69,90.04 U1.239
IN<2>: length 50.4
  TOP w0.18: U1.240 67.24,95 68.09,95.84 73.99,95.84 88.36,110.22 88.36,112.01 87.77,112.6 U2.7 85.78,112.6 84.87,113.51 84.87,125.11 J2.61
IN<3>: length 65.7
  TOP w0.18: J1.61 84.25,139.73 84.25,113.58 85.72,112.1 U2.6 87.73,112.1 88,111.83 88,110.41 73.86,96.26 65.91,96.26 65,95.35 U1.1
IN<4>: length 47.6
  TOP w0.18: J2.59 82.14,124.92 U2.1 82.87,114.1 84.35,112.62 84.35,107.26 73.71,96.62 65.76,96.62 64.5,95.36 U1.2
IN<5>: length 63.9
  TOP w0.18: U1.3 64,95.37 65.61,96.98 73.56,96.98 83.96,107.38 83.96,112.5 82.86,113.6 U2.2 81.42,113.6 81.2,113.83 81.2,124.94 81.72,125.46 81.72,139.74 J1.59
IN<6>: length 48.3
  TOP w0.18: J2.57 80.48,113.36 81.24,112.6 U2.4 82.97,112.6 83.57,111.99 83.57,107.5 73.41,97.34 65.46,97.34 63.5,95.38 U1.4
IN<7>: length 64.5
  TOP w0.18: J1.57 79.39,139.95 79.39,113.63 80.92,112.1 U2.5 82.91,112.1 83.18,111.83 83.18,107.62 73.26,97.7 65.31,97.7 63,95.39 63,94.2 U1.5
IN<8>: length 47
  TOP w0.18: U1.6 62.5,95.4 65.2,98.09 73.03,98.09 73.06,98.12 73.07,98.12 78.91,103.97 78.91,112.85 77.66,114.1 U3.10 76.28,124.15 77.23,125.11 77.25,125.11 J2.55
IN<9>: length 63.3
  TOP w0.18: J1.55 76.71,139.81 76.71,125.61 75.37,124.26 75.37,113.76 75.53,113.6 U3.9 77.65,113.6 78.55,112.69 78.55,104.12 72.92,98.48 65.08,98.48 62,95.41 U1.7
IN<10>: length 47.3
  TOP w0.18: U1.8 61.5,95.42 64.93,98.84 72.72,98.84 78.19,104.32 78.19,111.91 77.5,112.6 U3.7 75.62,112.6 74.71,113.51 74.71,125.11 J2.53
IN<11>: length 62.9
  TOP w0.18: U1.9 61,95.42 64.78,99.2 72.46,99.2 77.83,104.57 77.83,111.74 77.47,112.1 U3.6 75.56,112.1 74.09,113.58 74.09,139.73 J1.53
IN<12>: length 44.8
  TOP w0.18: U1.10 60.5,94.2 60.51,94.21 60.51,95.44 64.65,99.58 72.21,99.58 74.1,101.47 74.1,112.71 72.71,114.1 U3.1 71.98,124.92 J2.51
IN<13>: length 61.1
  TOP w0.18: U1.11 60,94.2 59.99,94.22 59.99,95.43 64.53,99.97 72.05,99.97 73.74,101.67 73.74,112.55 72.7,113.6 U3.2 71.26,113.6 71.04,113.83 71.04,124.94 71.56,125.46 71.56,139.74 J1.51
IN<14>: length 45.5
  TOP w0.18: U1.12 59.5,95.45 64.41,100.36 71.93,100.36 73.38,101.82 73.38,112.02 72.81,112.6 U3.4 71.08,112.6 70.32,113.36 J2.49
IN<15>: length 61.6
  TOP w0.18: U1.13 59,95.46 64.29,100.75 71.76,100.75 73.02,102.01 73.02,111.83 72.75,112.1 U3.5 70.76,112.1 69.23,113.63 69.23,139.95 J1.49
IN<16>: length 41.9
  TOP w0.18: J2.47 67.09,125.11 67.07,125.11 66.12,124.15 U4.10 67.74,114.1 68.82,113.02 68.82,102.64 67.32,101.14 64.17,101.14 58.5,95.47 U1.14
IN<17>: length 58.2
  TOP w0.18: J1.47 66.55,139.81 66.55,125.61 65.21,124.26 65.21,113.76 65.37,113.6 U4.9 67.72,113.6 68.46,112.86 68.46,102.88 67.09,101.51 63.96,101.51 58,95.55 U1.15
IN<18>: length 42.1
  TOP w0.18: U1.16 57.5,95.56 63.83,101.88 66.81,101.88 68.1,103.17 68.1,112 67.5,112.6 U4.7 65.46,112.6 64.55,113.51 64.55,125.11 J2.45
IN<19>: length 57.7
  TOP w0.18: U1.17 57,95.57 63.74,102.31 66.63,102.31 67.74,103.42 67.74,111.83 67.47,112.1 U4.6 65.4,112.1 63.93,113.58 63.93,139.73 J1.45
IN<20>: length 37.8
  TOP w0.18: J2.43 61.82,124.92 U4.1 62.55,114.1 64.03,112.62 64.03,103.11 56.5,95.58 U1.18
IN<21>: length 54.2
  TOP w0.18: U1.19 56,95.59 63.64,103.23 63.64,112.5 62.54,113.6 U4.2 61.1,113.6 60.88,113.83 60.88,124.94 61.4,125.46 61.4,139.74 J1.43
IN<22>: length 38.5
  TOP w0.18: J2.41 60.16,113.36 60.92,112.6 U4.4 62.65,112.6 63.25,111.99 63.25,103.35 55.5,95.6 U1.20
IN<23>: length 54.7
  TOP w0.18: J1.41 59.07,139.95 59.07,113.63 60.6,112.1 U4.5 62.59,112.1 62.86,111.83 62.86,103.49 55,95.63 55,94.21 55,94.2 U1.21
IN<24>: length 37.5
  TOP w0.18: U1.22 54.5,95.64 58.69,99.83 58.69,112.87 57.46,114.1 U5.10 55.96,124.15 56.91,125.11 56.93,125.11 J2.39
IN<25>: length 53.8
  TOP w0.18: J1.39 56.39,139.81 56.39,125.61 55.05,124.26 55.05,113.76 55.21,113.6 U5.9 57.44,113.6 58.33,112.72 58.33,99.98 54,95.65 U1.23
IN<26>: length 37.8
  TOP w0.18: U1.24 53.5,95.66 57.97,100.13 57.97,111.93 57.3,112.6 U5.7 55.3,112.6 54.39,113.51 54.39,125.11 J2.37
IN<27>: length 53.5
  TOP w0.18: J1.37 53.77,139.73 53.77,113.58 55.24,112.1 U5.6 57.25,112.1 57.61,111.74 57.61,100.28 53,95.67 U1.25
IN<28>: length 35.3
  TOP w0.18: U1.26 52.5,96.59 53.87,97.96 53.87,112.62 52.39,114.1 U5.1 51.66,124.92 J2.35
IN<29>: length 51.6
  TOP w0.18: U1.27 52,96.66 53.48,98.14 53.48,112.5 52.38,113.6 U5.2 50.94,113.6 50.72,113.83 50.72,124.94 51.24,125.46 51.24,139.74 J1.35
IN<30>: length 36
  TOP w0.18: J2.33 50,113.36 50.76,112.6 U5.4 52.49,112.6 53.09,111.99 53.09,98.32 51.5,96.73 U1.28
IN<31>: length 52.2
  TOP w0.18: J1.33 48.91,139.95 48.91,113.63 50.44,112.1 U5.5 52.43,112.1 52.7,111.83 52.7,98.45 51,96.75 U1.29
IN<32>: length 36.2
  TOP w0.18: J2.31 46.77,125.11 46.75,125.11 45.8,124.15 U6.10 47.15,114.1 48.31,112.94 48.31,98.45 50,96.76 U1.31
IN<33>: length 52.5
  TOP w0.18: U1.32 49.5,96.75 47.95,98.3 47.95,112.79 47.14,113.6 U6.9 45.05,113.6 44.89,113.76 44.89,124.26 46.23,125.61 46.23,139.81 J1.31
IN<34>: length 36.4
  TOP w0.18: U1.33 49,96.74 47.59,98.15 47.59,111.97 46.96,112.6 U6.7 45.14,112.6 44.23,113.51 44.23,125.11 J2.29
IN<35>: length 51.9
  TOP w0.18: J1.29 43.61,139.73 43.61,113.58 45.08,112.1 U6.6 46.95,112.1 47.23,111.82 47.23,98 48.5,96.73 U1.34
IN<36>: length 36.5
  TOP w0.18: U1.35 48,94.96 47.58,95.38 45.91,97.05 44.92,98.04 44.92,98.05 43.71,99.25 43.71,112.62 42.23,114.1 U6.1 41.5,124.92 J2.27
IN<37>: length 52.7
  TOP w0.18: J1.27 41.08,139.74 41.08,125.46 40.56,124.94 40.56,113.83 40.78,113.6 U6.2 42.22,113.6 43.32,112.5 43.32,99.13 44.35,98.11 44.35,98.1 44.56,97.89 45.66,96.79 47.5,94.95 U1.36
IN<38>: length 37
  TOP w0.18: J2.25 39.84,113.36 40.6,112.6 U6.4 42.33,112.6 42.93,111.99 42.93,99.01 43.99,97.95 44.1,97.84 44.2,97.74 45.35,96.59 47,94.94 U1.37
IN<39>: length 53.1
  TOP w0.18: J1.25 38.75,139.95 38.75,113.63 40.28,112.1 U6.5 42.27,112.1 42.54,111.83 42.54,105.86 42.56,105.84 42.56,98.85 43.81,97.59 43.81,97.59 46.5,94.9 U1.38
IN<40>: length 38.8
  TOP w0.18: J2.23 36.61,125.11 36.59,125.11 35.64,124.15 U7.10 36.98,114.1 38.51,112.57 38.51,102.34 43.32,97.53 43.56,97.29 43.69,97.16 46,94.85 U1.39
IN<41>: length 55
  TOP w0.18: J1.23 36.07,139.81 36.07,125.61 34.73,124.26 34.73,113.76 34.89,113.6 U7.9 36.96,113.6 38.15,112.41 38.15,102.19 43.11,97.22 45.5,94.84 U1.40
IN<42>: length 39
  TOP w0.18: U1.41 45,94.83 37.79,102.04 37.79,102.06 37.79,111.76 36.95,112.6 U7.7 34.98,112.6 34.07,113.51 34.07,125.11 J2.21
IN<43>: length 54.6
  TOP w0.18: J1.21 33.45,139.73 33.45,113.58 34.92,112.1 U7.6 36.94,112.1 37.43,111.62 37.43,102.82 37.43,101.89 42.69,96.63 42.79,96.53 42.82,96.5 44.5,94.82 U1.42
IN<44>: length 40.4
  TOP w0.18: J2.19 31.34,124.92 U7.1 32.07,114.1 33.55,112.62 33.55,103.02 34.17,102.4 36.42,102.4 37.07,101.75 37.07,101.74 44,94.81 U1.43
IN<45>: length 56.7
  TOP w0.18: U1.44 43.5,94.8 39.91,98.4 36.62,101.68 36.28,102.02 33.89,102.02 33.19,102.73 33.19,112.47 32.06,113.6 U7.2 30.62,113.6 30.4,113.83 30.4,124.94 30.92,125.46 30.92,139.74 J1.19
IN<46>: length 41.1
  TOP w0.18: J2.17 29.68,113.36 30.44,112.6 U7.4 32.17,112.6 32.77,111.99 32.77,102.4 33.51,101.66 36.13,101.66 36.47,101.32 36.55,101.24 38.02,99.77 43,94.79 U1.45
IN<47>: length 57.2
  TOP w0.18: J1.17 28.59,139.95 28.59,113.63 30.12,112.1 U7.5 32.14,112.1 32.38,111.86 32.38,102.23 33.38,101.23 36.05,101.23 36.32,100.96 36.33,100.96 39.18,98.1 42.5,94.78 U1.46
IN<48>: length 45.2
  TOP w0.18: U1.47 42,94.77 39.12,97.66 36.18,100.6 35.96,100.82 29.43,100.82 28.15,102.1 28.15,112.82 26.87,114.1 U8.10 25.48,124.15 26.43,125.11 26.45,125.11 J2.15
IN<49>: length 61.5
  TOP w0.18: J1.15 25.91,139.81 25.91,125.61 24.57,124.26 24.57,113.76 24.73,113.6 U8.9 26.85,113.6 27.77,112.69 27.77,101.74 29.06,100.45 35.82,100.45 41.5,94.76 U1.48
IN<50>: length 45.5
  TOP w0.18: J2.13 23.91,125.11 23.91,113.51 24.82,112.6 U8.7 26.67,112.6 27.39,111.88 27.39,101.47 28.83,100.03 35.71,100.03 41,94.74 U1.49
IN<51>: length 61.2
  TOP w0.18: J1.13 23.29,139.73 23.29,113.58 24.76,112.1 U8.6 26.66,112.1 27.02,111.74 27.02,101.19 28.6,99.61 35.62,99.61 40.5,94.73 U1.50
IN<52>: length 45.8
  TOP w0.18: U1.51 40,94.72 35.49,99.24 28.37,99.24 23.31,104.29 23.31,112.69 21.9,114.1 U8.1 21.18,124.92 J2.11
IN<53>: length 62
  TOP w0.18: U1.52 39.5,94.71 35.35,98.87 28.23,98.87 22.95,104.14 22.95,112.49 21.84,113.6 U8.2 20.46,113.6 20.24,113.83 20.24,124.94 20.76,125.46 20.76,139.74 J1.11
IN<54>: length 46.3
  TOP w0.18: J2.9 19.52,113.36 20.28,112.6 U8.4 21.94,112.6 22.57,111.97 22.57,103.97 28.04,98.5 35.21,98.5 39,94.71 U1.53
IN<55>: length 62.4
  TOP w0.18: U1.54 38.5,94.7 35.12,98.08 27.9,98.08 22.19,103.79 22.19,111.81 21.9,112.1 U8.5 19.96,112.1 18.43,113.63 18.43,139.95 J1.9
IN<56>: length 48.1
  TOP w0.18: U1.55 38,94.61 34.91,97.7 33.79,97.7 27.76,97.7 18.21,107.25 18.21,112.54 16.65,114.1 U9.10 15.32,124.15 16.27,125.11 16.29,125.11 J2.7
IN<57>: length 64.2
  TOP w0.18: J1.7 15.75,139.81 15.75,125.61 14.41,124.26 14.41,113.76 14.57,113.6 U9.9 16.64,113.6 17.84,112.4 17.84,111.87 17.85,111.87 17.85,107.1 27.61,97.34 33.94,97.34 34.64,97.34 37.5,94.48 U1.56
IN<58>: length 48.2
  TOP w0.18: U1.57 37,94.47 34.49,96.98 34.09,96.98 27.46,96.98 17.49,106.95 17.49,111.72 17.46,111.74 17.46,111.75 16.61,112.6 U9.7 14.66,112.6 13.75,113.51 13.75,125.11 J2.5
IN<59>: length 63.8
  TOP w0.18: J1.5 13.13,139.73 13.13,113.58 14.6,112.1 U9.6 16.6,112.1 17.1,111.6 17.1,106.82 27.31,96.62 34.35,96.62 36.5,94.46 U1.58
IN<60>: length 48.3
  TOP w0.18: J2.3 11.02,124.92 U9.1 11.75,114.1 13.23,112.62 13.23,110.19 27.16,96.26 28.05,96.26 34.2,96.26 36,94.45 U1.59
IN<61>: length 64.6
  TOP w0.18: U1.60 35.5,94.45 34.05,95.9 28.79,95.9 26.93,95.9 12.87,109.96 12.87,112.47 11.74,113.6 U9.2 10.3,113.6 10.08,113.83 10.08,124.94 10.6,125.46 10.6,139.74 J1.3
IN<62>: length 49.3
  TOP w0.18: J2.1 9.36,113.36 10.12,112.6 U9.4 11.85,112.6 12.45,111.99 12.45,109.8 26.74,95.5 32.08,95.5 33.26,94.32 U1.61
IN<63>: length 65.6
  TOP w0.18: U1.62 31.7,90.04 30.63,91.11 30.63,93.93 29.47,95.09 26.7,95.09 26.67,95.07 12.09,109.65 12.09,111.8 11.79,112.1 U9.5 9.8,112.1 8.27,113.63 8.27,139.95 J1.1
